# EAGLE board teensyShield1.3 (EAGLE 7.5.0)
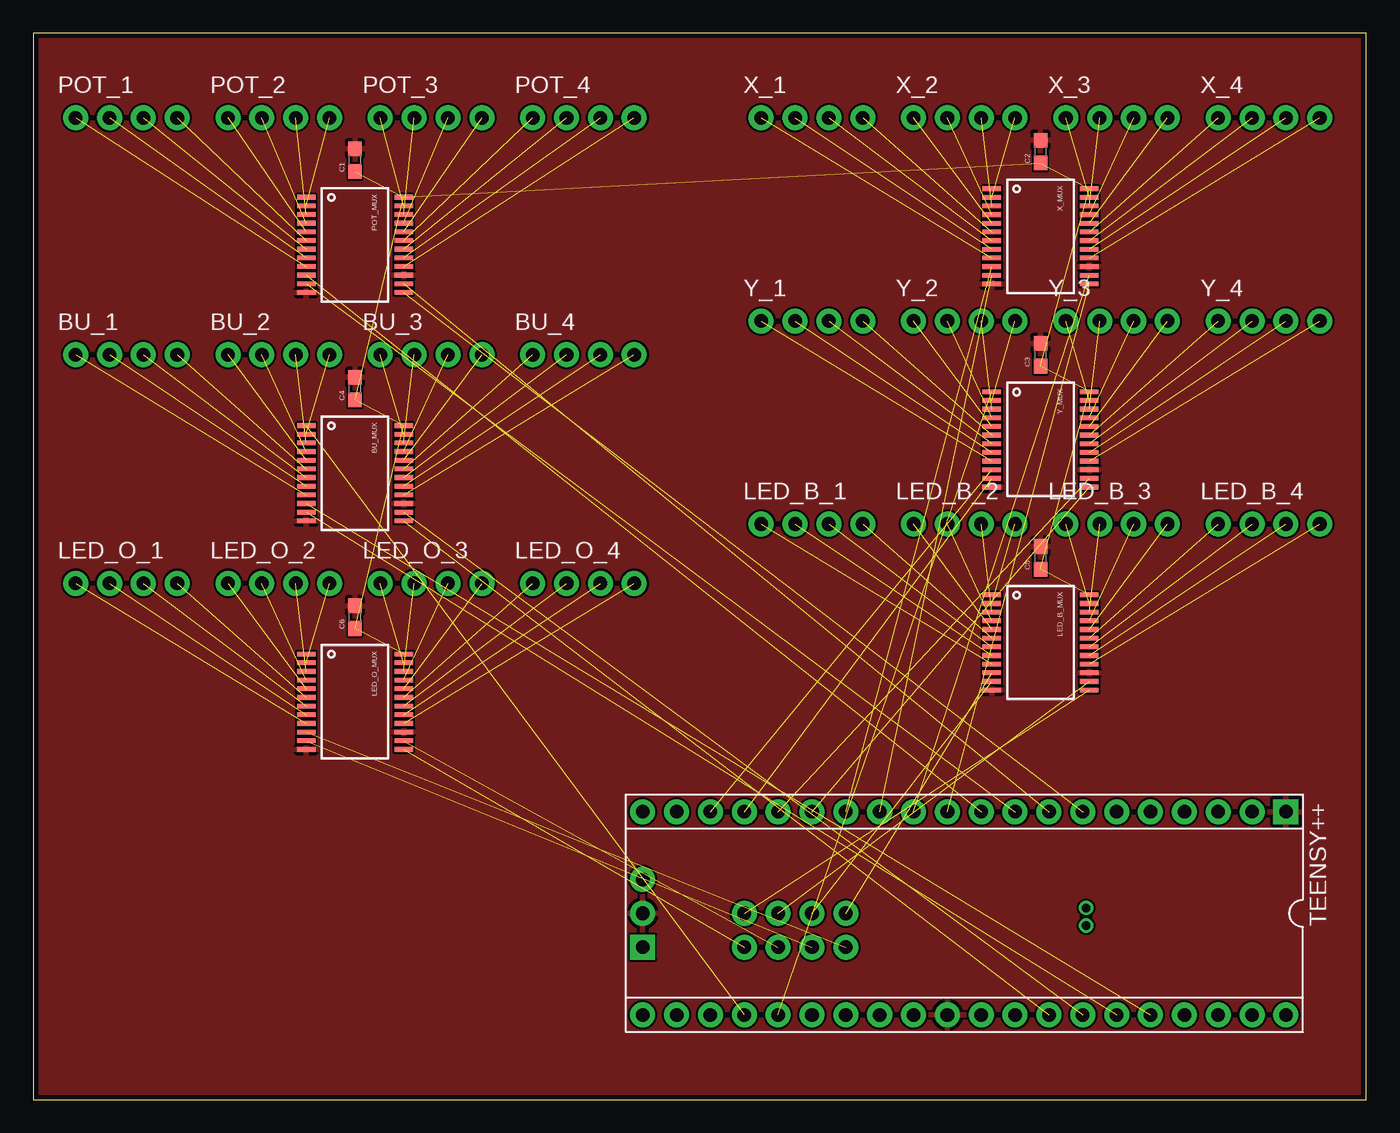
[diagram p0: board, top side]
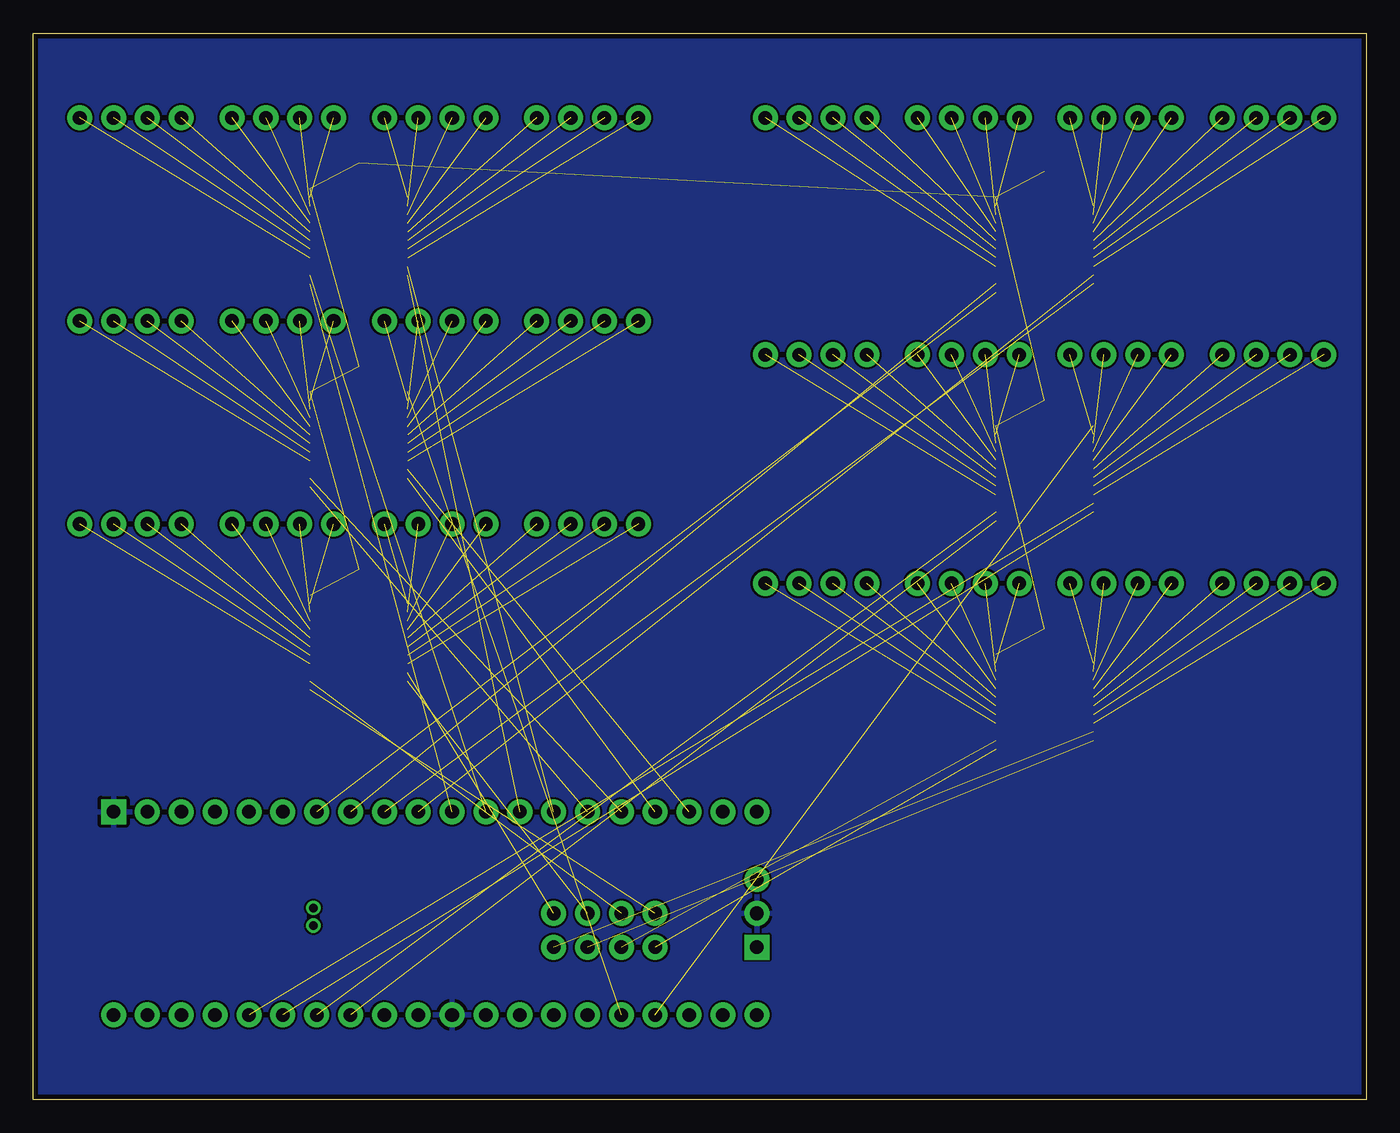
[diagram p1: board, bottom side, seen from below]

Size 100 x 80 mm. Coordinates in mm from the lower left corner, seen from the top.
Outline: 0,0 100,0 100,80 0,80 0,0
Copper layers (1*16): Top 0.0356mm / dielectric 1.5011mm / Bottom 0.0356mm
Design rules "oshpark-2layer": minimum track width 6mil, minimum drill 13mil, track to track 6mil, track to pad 6mil, pad to pad 6mil, via to via 6mil, smd to smd 6mil, copper to edge 15mil, drill to drill 6mil, minimum pad ring 7mil, minimum via ring 7mil, stop-mask expansion 2.5mil, vias tented up to drill 0mil, thermal gap 10mil

## Footprints (pad centres in the part's own frame; a part is rotated, then mirrored left to right if it is on the bottom)
1X04_NO_SILK_ALL_ROUND = drill 1.016 pad 1.88: 1 0,0; 2 2.54,0; 3 5.08,0; 4 7.62,0
SSOP24 = smd 0.348 x 1.397: 1 -3.575,-3.656; 2 -2.925,-3.656; 3 -2.275,-3.656; 4 -1.625,-3.656; 5 -0.975,-3.656; 6 -0.325,-3.656; 7 0.325,-3.656; 8 0.975,-3.656; 9 1.625,-3.656; 10 2.275,-3.656; 11 2.925,-3.656; 12 3.575,-3.656; 13 3.575,3.656; 14 2.925,3.656; 15 2.275,3.656; 16 1.625,3.656; 17 0.975,3.656; 18 0.325,3.656; 19 -0.325,3.656; 20 -0.975,3.656; 21 -1.625,3.656; 22 -2.275,3.656; 23 -2.925,3.656; 24 -3.575,3.656
0603 = smd 1.1 x 1: 1 -0.85,0; 2 0.85,0
TEENSY++ = drill 1.016 pad 1.88: 5V 24.13,-2.54; +5V -24.13,7.62; A0 8.89,0; A1 11.43,0; A2 13.97,0; A3 16.51,0; A4 8.89,2.54; A5 11.43,2.54; A6 13.97,2.54; A7 16.51,2.54; B0 -6.35,7.62; B1 -8.89,7.62; B2 -11.43,7.62; B3 -13.97,7.62; B4 -16.51,7.62; B5 -19.05,7.62; B6 -21.59,7.62; B7 -21.59,-7.62; C0 6.35,-7.62; C1 8.89,-7.62; C2 11.43,-7.62; C3 13.97,-7.62; C4 16.51,-7.62; C5 19.05,-7.62; C6 21.59,-7.62; C7 24.13,-7.62; D0 -19.05,-7.62; D1 -16.51,-7.62; D2 -13.97,-7.62; D3 -11.43,-7.62; D4 -8.89,-7.62; D5 -6.35,-7.62; D6 -3.81,-7.62; D7 -1.27,-7.62; E0 1.27,-7.62; E1 3.81,-7.62; E6 -1.27,7.62; E7 -3.81,7.62; F0 6.35,7.62; F1 8.89,7.62; F2 11.43,7.62; F3 13.97,7.62; F4 16.51,7.62; F5 19.05,7.62; F6 21.59,7.62; F7 24.13,7.62; GND2 24.13,0; GRND1 1.27,7.62; REF 3.81,7.62 | drill 0.635 pad 1.067: E4 -9.144,0.914; E5 -9.144,-0.406 | drill 1.016 pad 1.88 square: GND -24.13,-7.62; RST 24.13,2.54

## Placement (x,y rotation side)
BU_1  [1X04_NO_SILK_ALL_ROUND]  3.17,55.88 0 top
BU_2  [1X04_NO_SILK_ALL_ROUND]  14.61,55.88 0 top
BU_3  [1X04_NO_SILK_ALL_ROUND]  26.04,55.88 0 top
BU_4  [1X04_NO_SILK_ALL_ROUND]  37.47,55.88 0 top
BU_MUX  MUX-74HC4067  [SSOP24]  24.13,46.99 270 top
C1  0.1uF  [0603]  24.13,70.48 90 top
C2  0.1uF  [0603]  75.56,71.12 90 top
C3  0.1uF  [0603]  75.56,55.88 90 top
C4  0.1uF  [0603]  24.13,53.34 90 top
C5  0.1uF  [0603]  75.56,40.64 90 top
C6  0.1uF  [0603]  24.13,36.2 90 top
LED_B_1  [1X04_NO_SILK_ALL_ROUND]  54.61,43.18 0 top
LED_B_2  [1X04_NO_SILK_ALL_ROUND]  66.04,43.18 0 top
LED_B_3  [1X04_NO_SILK_ALL_ROUND]  77.47,43.18 0 top
LED_B_4  [1X04_NO_SILK_ALL_ROUND]  88.9,43.18 0 top
LED_B_MUX  MUX-74HC4067  [SSOP24]  75.56,34.29 270 top
LED_O_1  [1X04_NO_SILK_ALL_ROUND]  3.17,38.73 0 top
LED_O_2  [1X04_NO_SILK_ALL_ROUND]  14.61,38.73 0 top
LED_O_3  [1X04_NO_SILK_ALL_ROUND]  26.04,38.73 0 top
LED_O_4  [1X04_NO_SILK_ALL_ROUND]  37.47,38.73 0 top
LED_O_MUX  MUX-74HC4067  [SSOP24]  24.13,29.84 270 top
POT_1  [1X04_NO_SILK_ALL_ROUND]  3.17,73.66 0 top
POT_2  [1X04_NO_SILK_ALL_ROUND]  14.61,73.66 0 top
POT_3  [1X04_NO_SILK_ALL_ROUND]  26.04,73.66 0 top
POT_4  [1X04_NO_SILK_ALL_ROUND]  37.47,73.66 0 top
POT_MUX  MUX-74HC4067  [SSOP24]  24.13,64.14 270 top
TEENSY++  ARDUINO-TEENSY++  [TEENSY++]  69.85,13.97 180 top
X_1  [1X04_NO_SILK_ALL_ROUND]  54.61,73.66 0 top
X_2  [1X04_NO_SILK_ALL_ROUND]  66.04,73.66 0 top
X_3  [1X04_NO_SILK_ALL_ROUND]  77.47,73.66 0 top
X_4  [1X04_NO_SILK_ALL_ROUND]  88.9,73.66 0 top
X_MUX  MUX-74HC4067  [SSOP24]  75.56,64.77 270 top
Y_1  [1X04_NO_SILK_ALL_ROUND]  54.61,58.42 0 top
Y_2  [1X04_NO_SILK_ALL_ROUND]  66.04,58.42 0 top
Y_3  [1X04_NO_SILK_ALL_ROUND]  77.47,58.42 0 top
Y_4  [1X04_NO_SILK_ALL_ROUND]  88.9,58.42 0 top
Y_MUX  MUX-74HC4067  [SSOP24]  75.56,49.53 270 top

## Library data of the parts
BU_1-BU_4 LED_B_1-LED_B_4 LED_O_1-LED_O_4 POT_1-POT_4 X_1-X_4 Y_1-Y_4 = SparkFun-Connectors; PROD_ID: CONN-09696
BU_MUX C1-C6 LED_B_MUX LED_O_MUX POT_MUX X_MUX Y_MUX = SparkFun
TEENSY++ = teensypp

## Nets
5V: BU_MUX.24 C1.1 C2.1 C3.1 C4.1 C5.1 C6.1 LED_B_MUX.24 LED_O_MUX.24 POT_MUX.24 X_MUX.24 Y_MUX.24
BU_C0: BU_1.1 BU_MUX.9
BU_C1: BU_1.2 BU_MUX.8
BU_C2: BU_1.3 BU_MUX.7
BU_C3: BU_1.4 BU_MUX.6
BU_C4: BU_2.1 BU_MUX.5
BU_C5: BU_2.2 BU_MUX.4
BU_C6: BU_2.3 BU_MUX.3
BU_C7: BU_2.4 BU_MUX.2
BU_C8: BU_3.1 BU_MUX.23
BU_C9: BU_3.2 BU_MUX.22
BU_C10: BU_3.3 BU_MUX.21
BU_C11: BU_3.4 BU_MUX.20
BU_C12: BU_4.1 BU_MUX.19
BU_C13: BU_4.2 BU_MUX.18
BU_C14: BU_4.3 BU_MUX.17
BU_C15: BU_4.4 BU_MUX.16
BU_S0: BU_MUX.10 TEENSY++.B3
BU_S1: BU_MUX.11 TEENSY++.B2
BU_S2: BU_MUX.14 TEENSY++.B1
BU_S3: BU_MUX.13 TEENSY++.B0
BU_SIG: BU_MUX.1 TEENSY++.F4
GND: BU_MUX.12 BU_MUX.15 C1.2 C2.2 C3.2 C4.2 C5.2 C6.2 LED_B_MUX.12 LED_B_MUX.15 LED_O_MUX.12 LED_O_MUX.15 POT_MUX.12 POT_MUX.15 TEENSY++.GND TEENSY++.GND2 TEENSY++.GRND1 X_MUX.12 X_MUX.15 Y_MUX.12 Y_MUX.15
LED_B_C0: LED_B_1.1 LED_B_MUX.9
LED_B_C1: LED_B_1.2 LED_B_MUX.8
LED_B_C2: LED_B_1.3 LED_B_MUX.7
LED_B_C3: LED_B_1.4 LED_B_MUX.6
LED_B_C4: LED_B_2.1 LED_B_MUX.5
LED_B_C5: LED_B_2.2 LED_B_MUX.4
LED_B_C6: LED_B_2.3 LED_B_MUX.3
LED_B_C7: LED_B_2.4 LED_B_MUX.2
LED_B_C8: LED_B_3.1 LED_B_MUX.23
LED_B_C9: LED_B_3.2 LED_B_MUX.22
LED_B_C10: LED_B_3.3 LED_B_MUX.21
LED_B_C11: LED_B_3.4 LED_B_MUX.20
LED_B_C12: LED_B_4.1 LED_B_MUX.19
LED_B_C13: LED_B_4.2 LED_B_MUX.18
LED_B_C14: LED_B_4.3 LED_B_MUX.17
LED_B_C15: LED_B_4.4 LED_B_MUX.16
LED_B_S0: LED_B_MUX.10 TEENSY++.A0
LED_B_S1: LED_B_MUX.11 TEENSY++.A1
LED_B_S2: LED_B_MUX.14 TEENSY++.A2
LED_B_S3: LED_B_MUX.13 TEENSY++.A3
LED_B_SIG: LED_B_MUX.1
LED_O_C0: LED_O_1.1 LED_O_MUX.9
LED_O_C1: LED_O_1.2 LED_O_MUX.8
LED_O_C2: LED_O_1.3 LED_O_MUX.7
LED_O_C3: LED_O_1.4 LED_O_MUX.6
LED_O_C4: LED_O_2.1 LED_O_MUX.5
LED_O_C5: LED_O_2.2 LED_O_MUX.4
LED_O_C6: LED_O_2.3 LED_O_MUX.3
LED_O_C7: LED_O_2.4 LED_O_MUX.2
LED_O_C8: LED_O_3.1 LED_O_MUX.23
LED_O_C9: LED_O_3.2 LED_O_MUX.22
LED_O_C10: LED_O_3.3 LED_O_MUX.21
LED_O_C11: LED_O_3.4 LED_O_MUX.20
LED_O_C12: LED_O_4.1 LED_O_MUX.19
LED_O_C13: LED_O_4.2 LED_O_MUX.18
LED_O_C14: LED_O_4.3 LED_O_MUX.17
LED_O_C15: LED_O_4.4 LED_O_MUX.16
LED_O_S0: LED_O_MUX.10 TEENSY++.A4
LED_O_S1: LED_O_MUX.11 TEENSY++.A5
LED_O_S2: LED_O_MUX.14 TEENSY++.A6
LED_O_S3: LED_O_MUX.13 TEENSY++.A7
LED_O_SIG: LED_O_MUX.1
N$1: TEENSY++.F2
N$2: TEENSY++.F1
N$3: TEENSY++.F5
N$4: TEENSY++.+5V
N$5: TEENSY++.F6
POT_C0: POT_1.1 POT_MUX.9
POT_C1: POT_1.2 POT_MUX.8
POT_C2: POT_1.3 POT_MUX.7
POT_C3: POT_1.4 POT_MUX.6
POT_C4: POT_2.1 POT_MUX.5
POT_C5: POT_2.2 POT_MUX.4
POT_C6: POT_2.3 POT_MUX.3
POT_C7: POT_2.4 POT_MUX.2
POT_C8: POT_3.1 POT_MUX.23
POT_C9: POT_3.2 POT_MUX.22
POT_C10: POT_3.3 POT_MUX.21
POT_C11: POT_3.4 POT_MUX.20
POT_C12: POT_4.1 POT_MUX.19
POT_C13: POT_4.2 POT_MUX.18
POT_C14: POT_4.3 POT_MUX.17
POT_C15: POT_4.4 POT_MUX.16
POT_S0: POT_MUX.10 TEENSY++.D7
POT_S1: POT_MUX.11 TEENSY++.D6
POT_S2: POT_MUX.14 TEENSY++.D5
POT_S3: POT_MUX.13 TEENSY++.D4
POT_SIG: POT_MUX.1
VCC: TEENSY++.5V
X_C0: X_1.1 X_MUX.9
X_C1: X_1.2 X_MUX.8
X_C2: X_1.3 X_MUX.7
X_C3: X_1.4 X_MUX.6
X_C4: X_2.1 X_MUX.5
X_C5: X_2.2 X_MUX.4
X_C6: X_2.3 X_MUX.3
X_C7: X_2.4 X_MUX.2
X_C8: X_3.1 X_MUX.23
X_C9: X_3.2 X_MUX.22
X_C10: X_3.3 X_MUX.21
X_C11: X_3.4 X_MUX.20
X_C12: X_4.1 X_MUX.19
X_C13: X_4.2 X_MUX.18
X_C14: X_4.3 X_MUX.17
X_C15: X_4.4 X_MUX.16
X_S0: TEENSY++.C1 X_MUX.10
X_S1: TEENSY++.C0 X_MUX.11
X_S2: TEENSY++.E1 X_MUX.14
X_S3: TEENSY++.E0 X_MUX.13
X_SIG: X_MUX.1
Y_C0: Y_1.1 Y_MUX.9
Y_C1: Y_1.2 Y_MUX.8
Y_C2: Y_1.3 Y_MUX.7
Y_C3: Y_1.4 Y_MUX.6
Y_C4: Y_2.1 Y_MUX.5
Y_C5: Y_2.2 Y_MUX.4
Y_C6: Y_2.3 Y_MUX.3
Y_C7: Y_2.4 Y_MUX.2
Y_C8: Y_3.1 Y_MUX.23
Y_C9: Y_3.2 Y_MUX.22
Y_C10: Y_3.3 Y_MUX.21
Y_C11: Y_3.4 Y_MUX.20
Y_C12: Y_4.1 Y_MUX.19
Y_C13: Y_4.2 Y_MUX.18
Y_C14: Y_4.3 Y_MUX.17
Y_C15: Y_4.4 Y_MUX.16
Y_S0: TEENSY++.C5 Y_MUX.10
Y_S1: TEENSY++.C4 Y_MUX.11
Y_S2: TEENSY++.C3 Y_MUX.14
Y_S3: TEENSY++.C2 Y_MUX.13
Y_SIG: TEENSY++.F3 Y_MUX.1

## Tracks (layer width: path | path; a pad name or v marks a point on that pad's centre or on a via)
5V  (11 unrouted)
BU_C0  (1 unrouted)
BU_C1  (1 unrouted)
BU_C2  (1 unrouted)
BU_C3  (1 unrouted)
BU_C4  (1 unrouted)
BU_C5  (1 unrouted)
BU_C6  (1 unrouted)
BU_C7  (1 unrouted)
BU_C8  (1 unrouted)
BU_C9  (1 unrouted)
BU_C10  (1 unrouted)
BU_C11  (1 unrouted)
BU_C12  (1 unrouted)
BU_C13  (1 unrouted)
BU_C14  (1 unrouted)
BU_C15  (1 unrouted)
BU_S0  (1 unrouted)
BU_S1  (1 unrouted)
BU_S2  (1 unrouted)
BU_S3  (1 unrouted)
BU_SIG  (1 unrouted)
GND
  pour Top: 0,0 100.33,0 100.33,80.01 0,80.01
  pour Bottom: 0,0 100.33,0 100.33,80.01 0,80.01
LED_B_C0  (1 unrouted)
LED_B_C1  (1 unrouted)
LED_B_C2  (1 unrouted)
LED_B_C3  (1 unrouted)
LED_B_C4  (1 unrouted)
LED_B_C5  (1 unrouted)
LED_B_C6  (1 unrouted)
LED_B_C7  (1 unrouted)
LED_B_C8  (1 unrouted)
LED_B_C9  (1 unrouted)
LED_B_C10  (1 unrouted)
LED_B_C11  (1 unrouted)
LED_B_C12  (1 unrouted)
LED_B_C13  (1 unrouted)
LED_B_C14  (1 unrouted)
LED_B_C15  (1 unrouted)
LED_B_S0  (1 unrouted)
LED_B_S1  (1 unrouted)
LED_B_S2  (1 unrouted)
LED_B_S3  (1 unrouted)
LED_O_C0  (1 unrouted)
LED_O_C1  (1 unrouted)
LED_O_C2  (1 unrouted)
LED_O_C3  (1 unrouted)
LED_O_C4  (1 unrouted)
LED_O_C5  (1 unrouted)
LED_O_C6  (1 unrouted)
LED_O_C7  (1 unrouted)
LED_O_C8  (1 unrouted)
LED_O_C9  (1 unrouted)
LED_O_C10  (1 unrouted)
LED_O_C11  (1 unrouted)
LED_O_C12  (1 unrouted)
LED_O_C13  (1 unrouted)
LED_O_C14  (1 unrouted)
LED_O_C15  (1 unrouted)
LED_O_S0  (1 unrouted)
LED_O_S1  (1 unrouted)
LED_O_S2  (1 unrouted)
LED_O_S3  (1 unrouted)
POT_C0  (1 unrouted)
POT_C1  (1 unrouted)
POT_C2  (1 unrouted)
POT_C3  (1 unrouted)
POT_C4  (1 unrouted)
POT_C5  (1 unrouted)
POT_C6  (1 unrouted)
POT_C7  (1 unrouted)
POT_C8  (1 unrouted)
POT_C9  (1 unrouted)
POT_C10  (1 unrouted)
POT_C11  (1 unrouted)
POT_C12  (1 unrouted)
POT_C13  (1 unrouted)
POT_C14  (1 unrouted)
POT_C15  (1 unrouted)
POT_S0  (1 unrouted)
POT_S1  (1 unrouted)
POT_S2  (1 unrouted)
POT_S3  (1 unrouted)
X_C0  (1 unrouted)
X_C1  (1 unrouted)
X_C2  (1 unrouted)
X_C3  (1 unrouted)
X_C4  (1 unrouted)
X_C5  (1 unrouted)
X_C6  (1 unrouted)
X_C7  (1 unrouted)
X_C8  (1 unrouted)
X_C9  (1 unrouted)
X_C10  (1 unrouted)
X_C11  (1 unrouted)
X_C12  (1 unrouted)
X_C13  (1 unrouted)
X_C14  (1 unrouted)
X_C15  (1 unrouted)
X_S0  (1 unrouted)
X_S1  (1 unrouted)
X_S2  (1 unrouted)
X_S3  (1 unrouted)
Y_C0  (1 unrouted)
Y_C1  (1 unrouted)
Y_C2  (1 unrouted)
Y_C3  (1 unrouted)
Y_C4  (1 unrouted)
Y_C5  (1 unrouted)
Y_C6  (1 unrouted)
Y_C7  (1 unrouted)
Y_C8  (1 unrouted)
Y_C9  (1 unrouted)
Y_C10  (1 unrouted)
Y_C11  (1 unrouted)
Y_C12  (1 unrouted)
Y_C13  (1 unrouted)
Y_C14  (1 unrouted)
Y_C15  (1 unrouted)
Y_S0  (1 unrouted)
Y_S1  (1 unrouted)
Y_S2  (1 unrouted)
Y_S3  (1 unrouted)
Y_SIG  (1 unrouted)